# Altium PCB auto_threader.PcbDoc (part 1 of 2)
Units mil, origin at the board's own origin, x right, y up, seen from the top; angles counter-clockwise.
Board outline 1320 x 1690 mil, 4 copper layers (Signal 1, Ground, Power, Signal 2), stack 23.756 mil thick; 26 components, 26 nets, 116 pads, 98 vias.
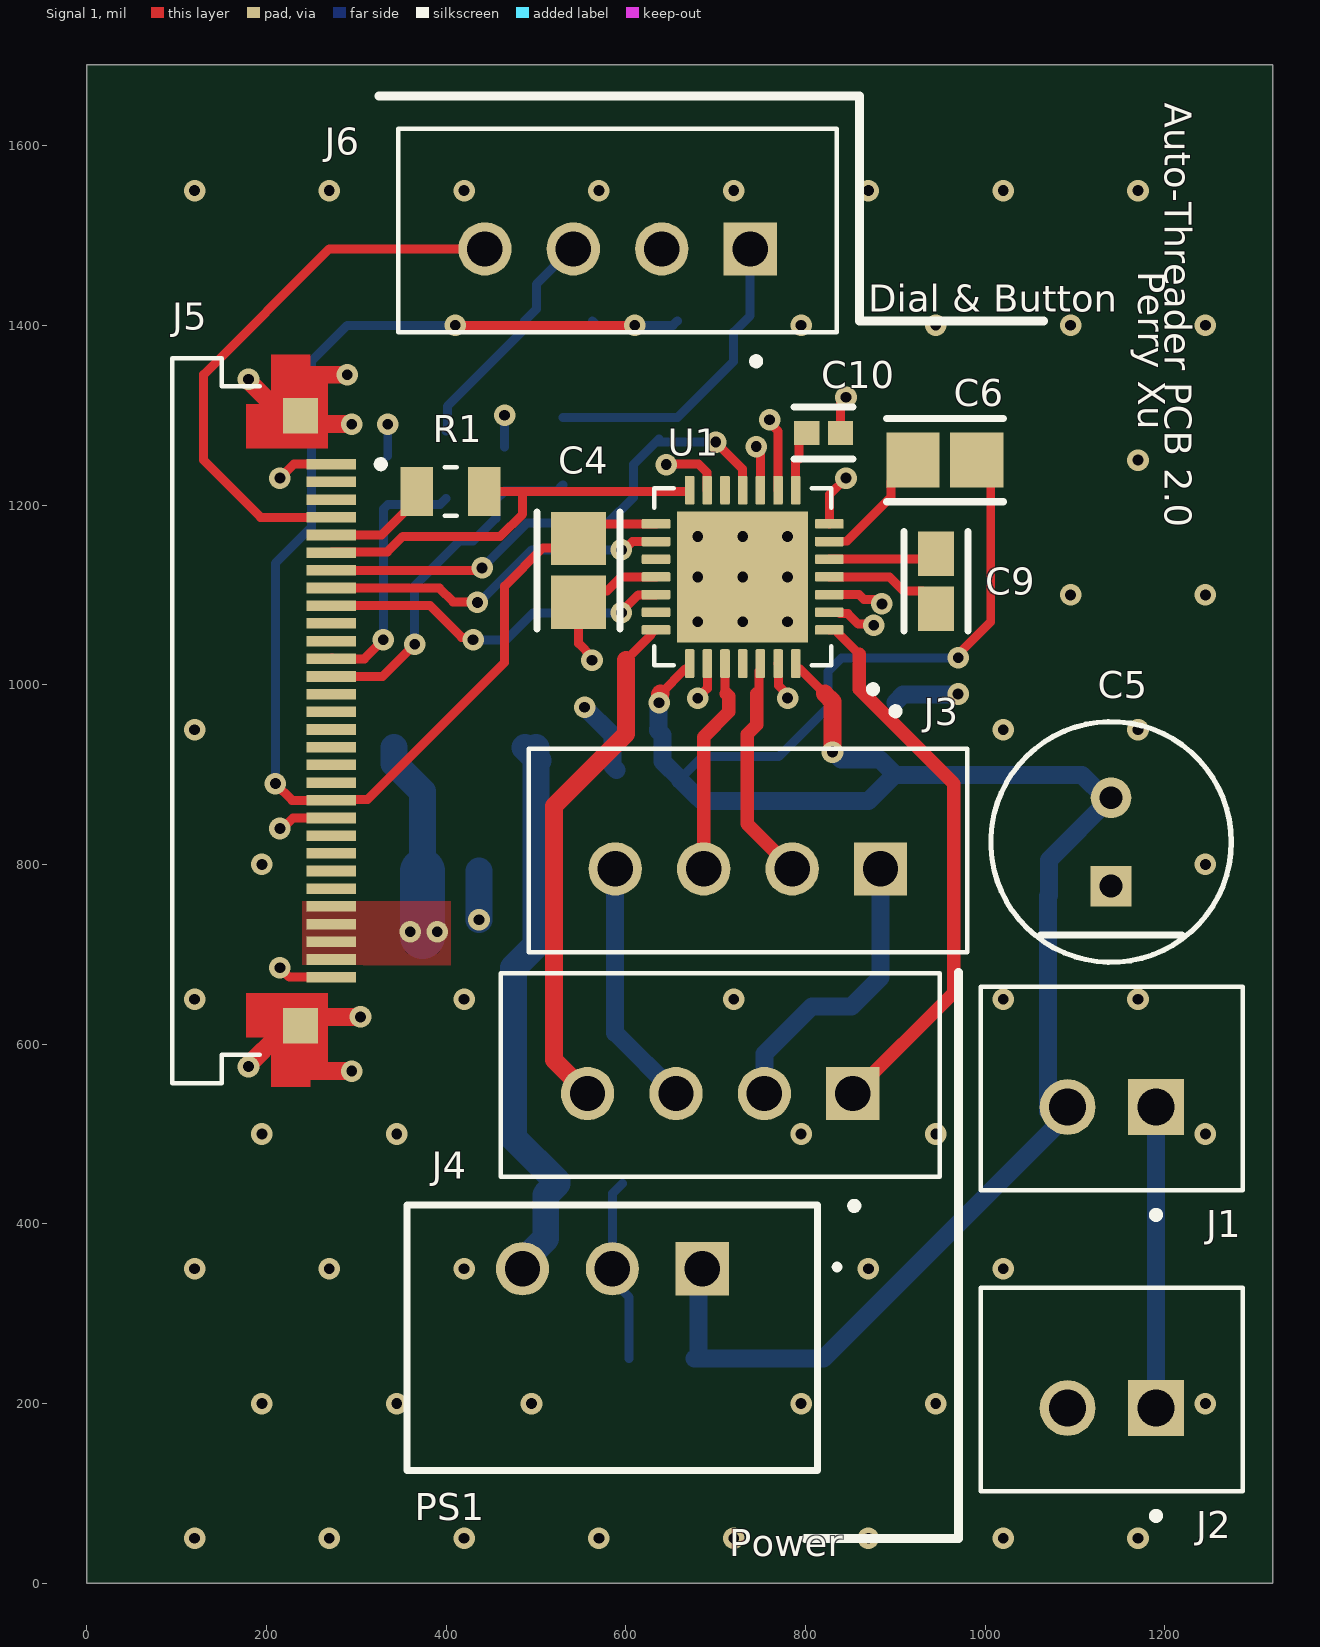
[diagram p0: Signal 1 view]
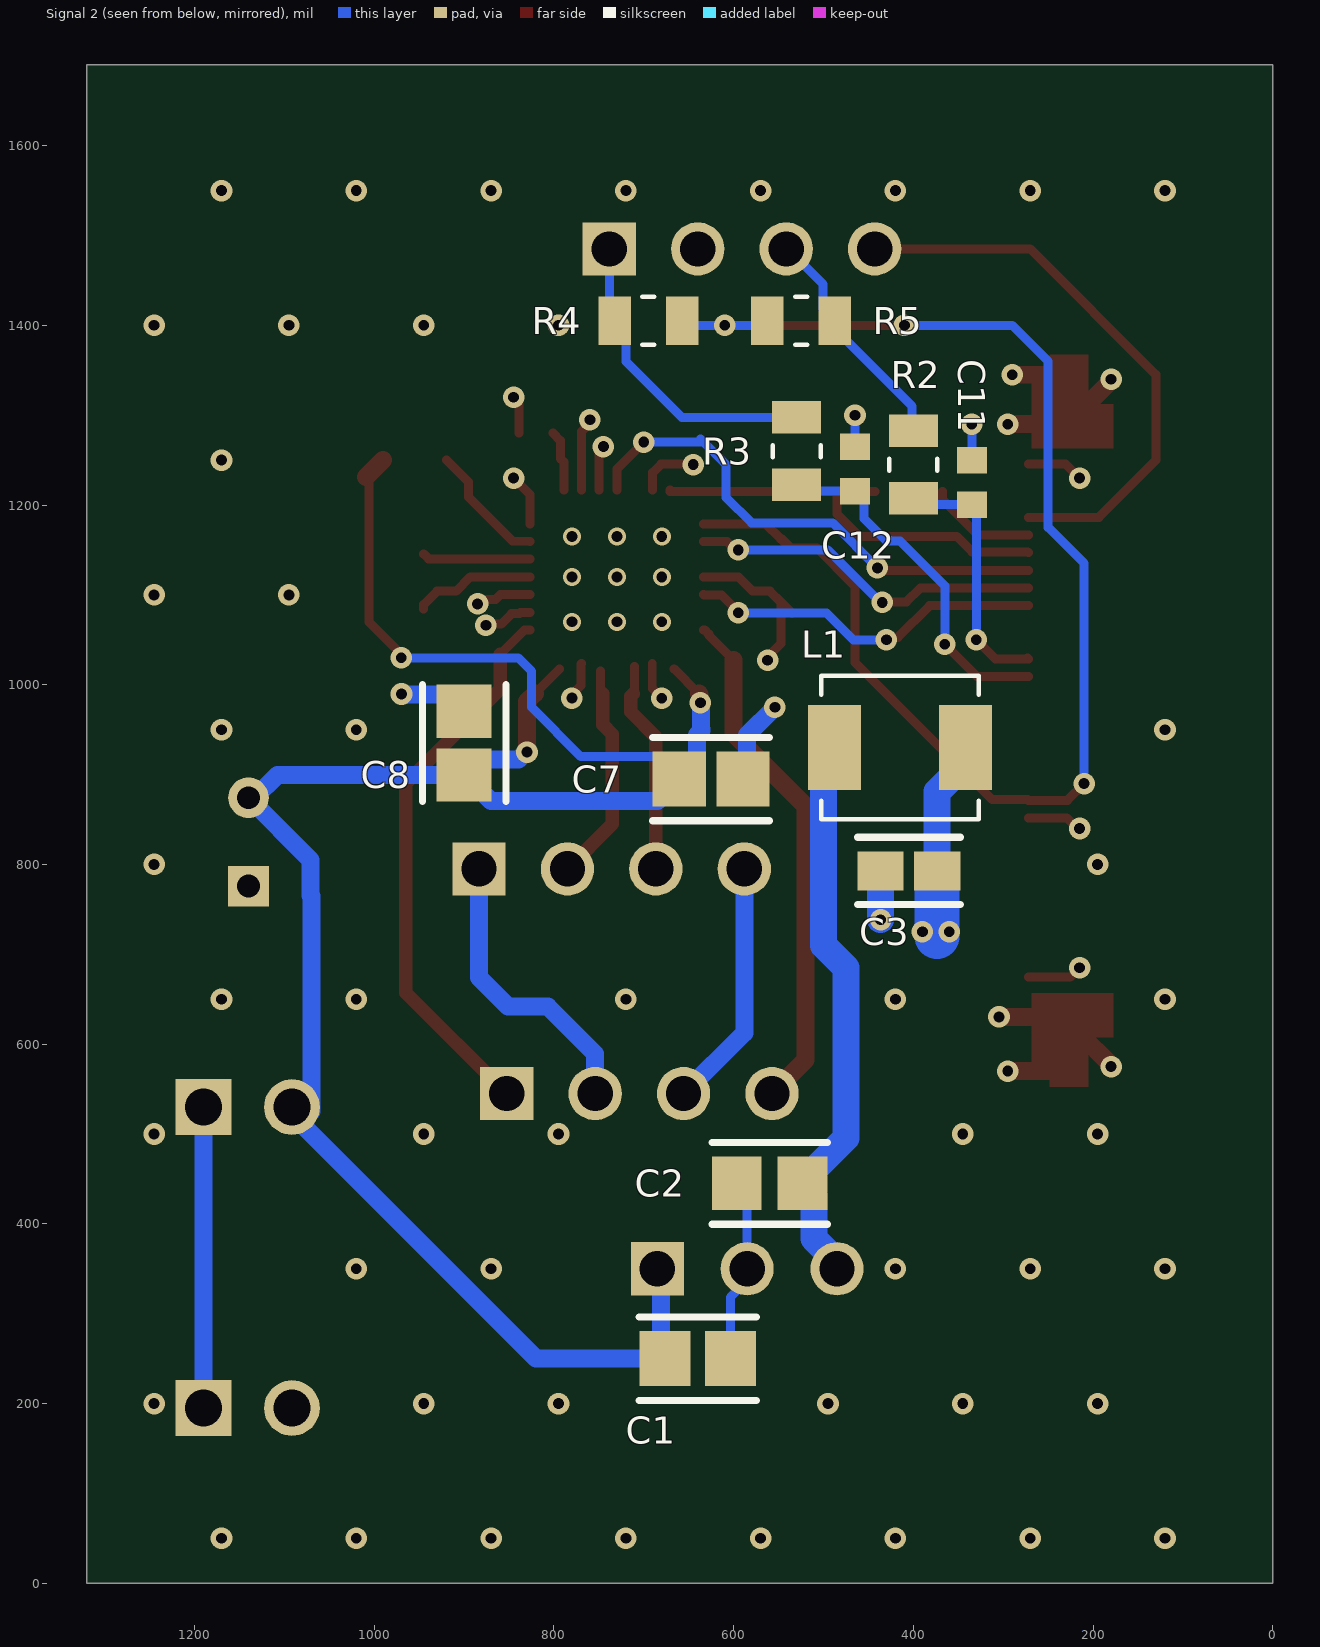
[diagram p1: Signal 2 view, seen from below]
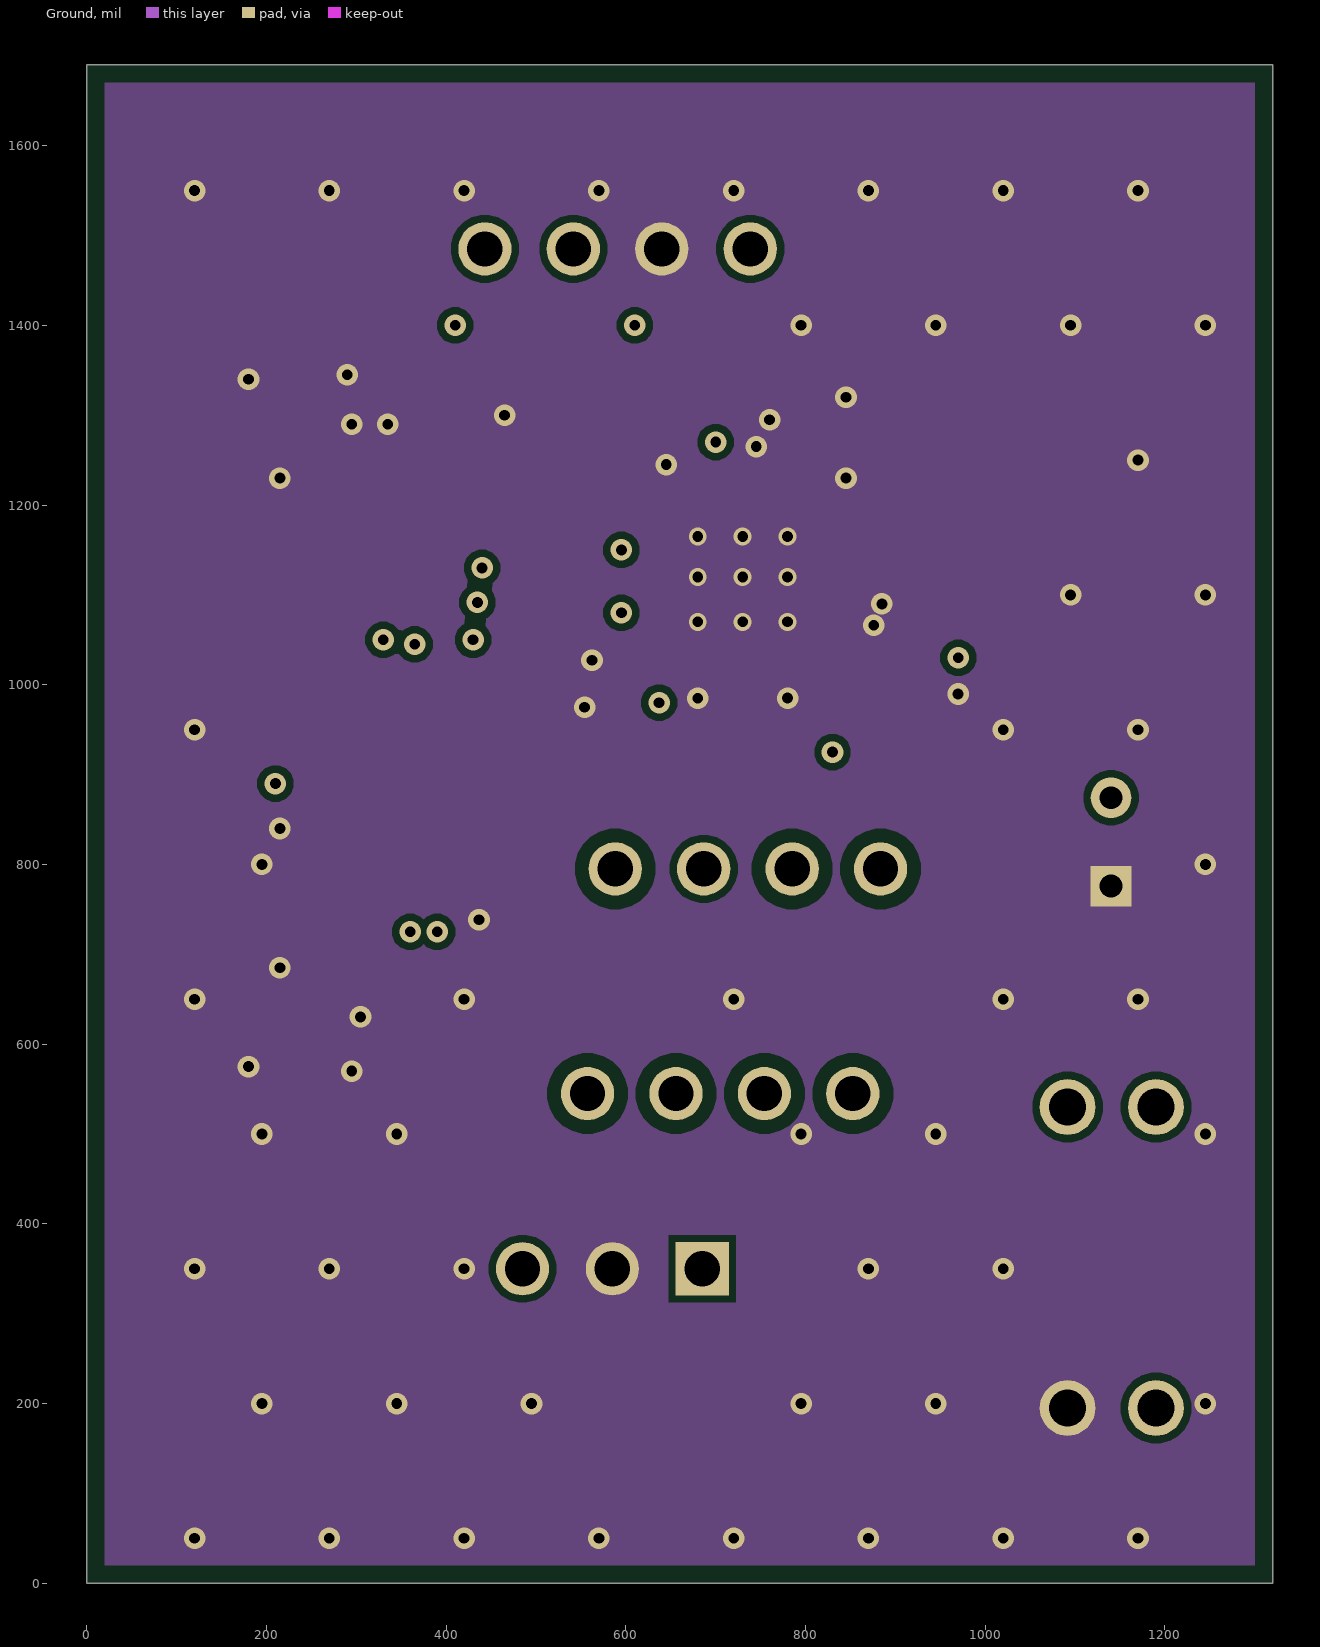
[diagram p2: Ground]
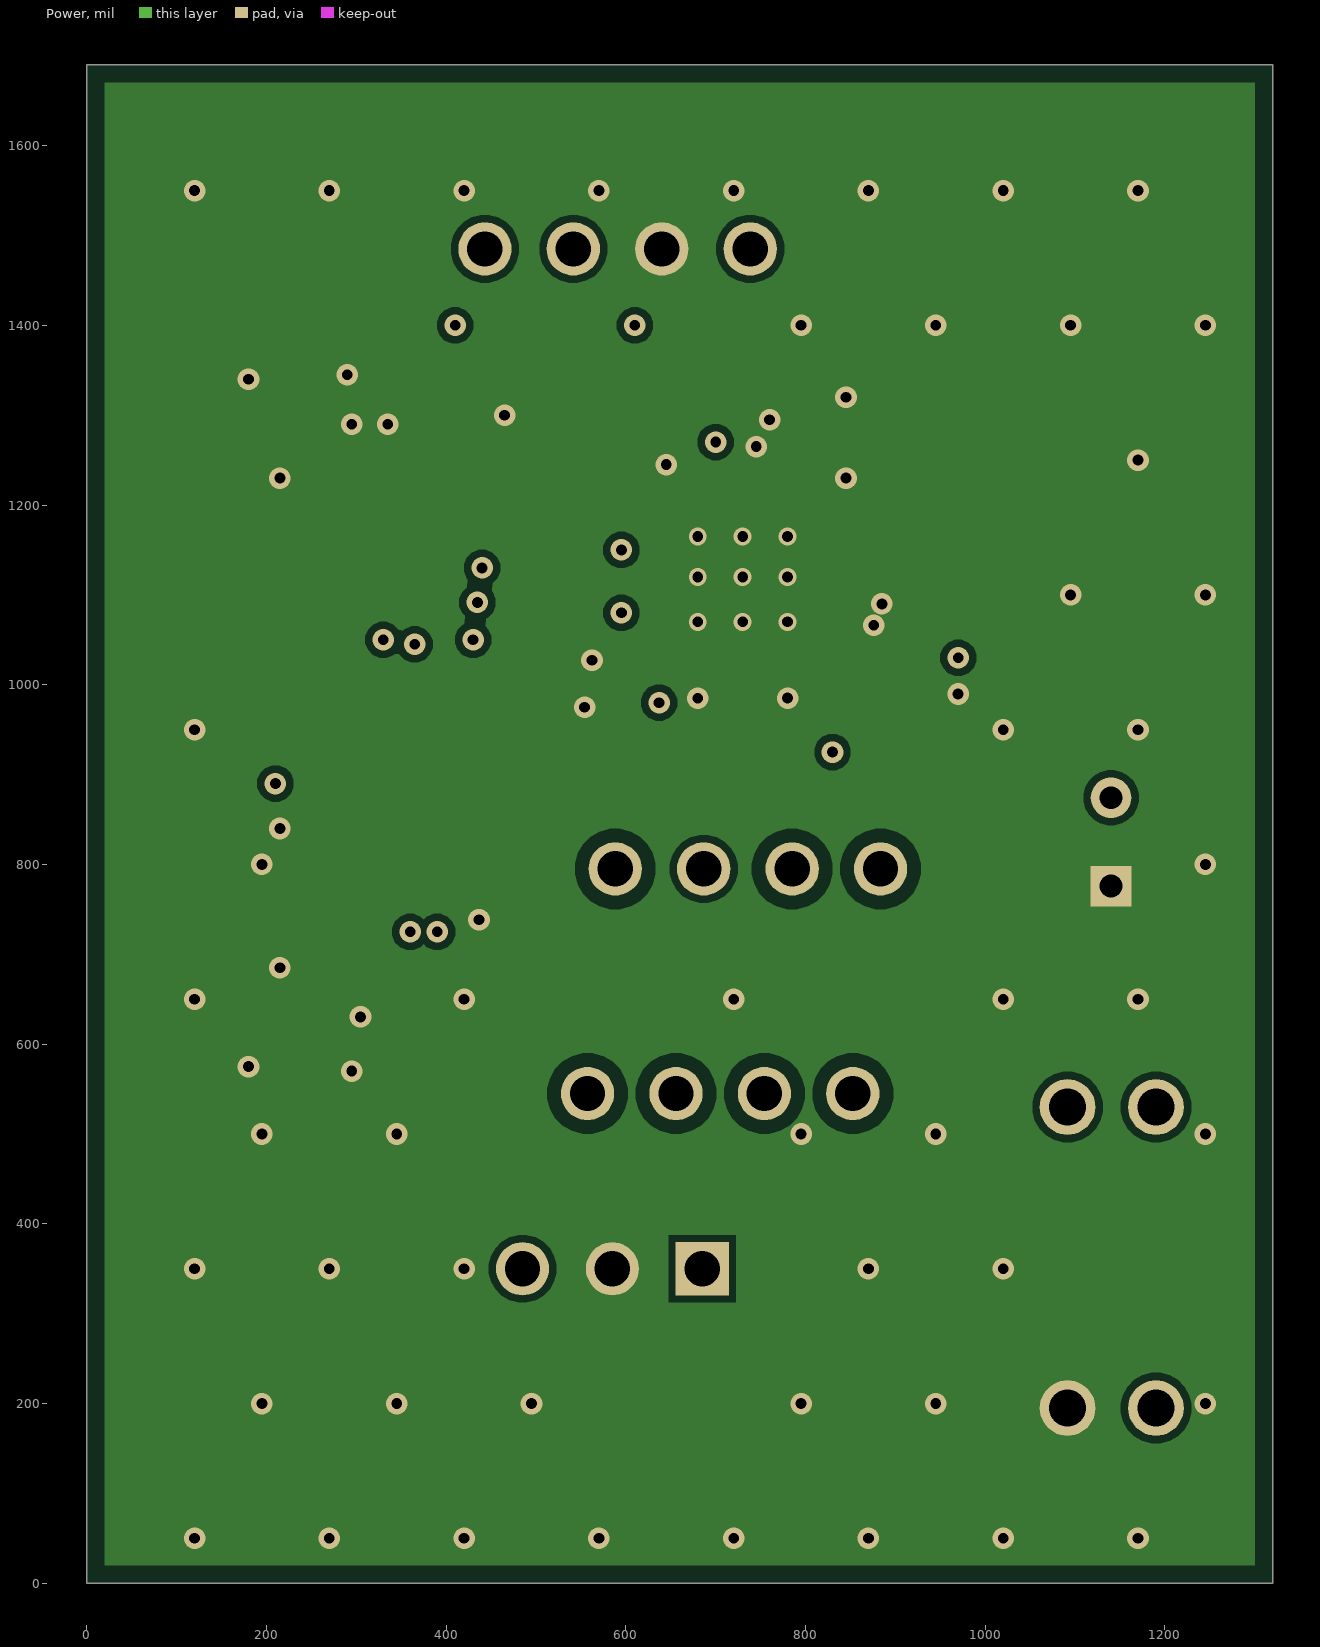
[diagram p3: Power]
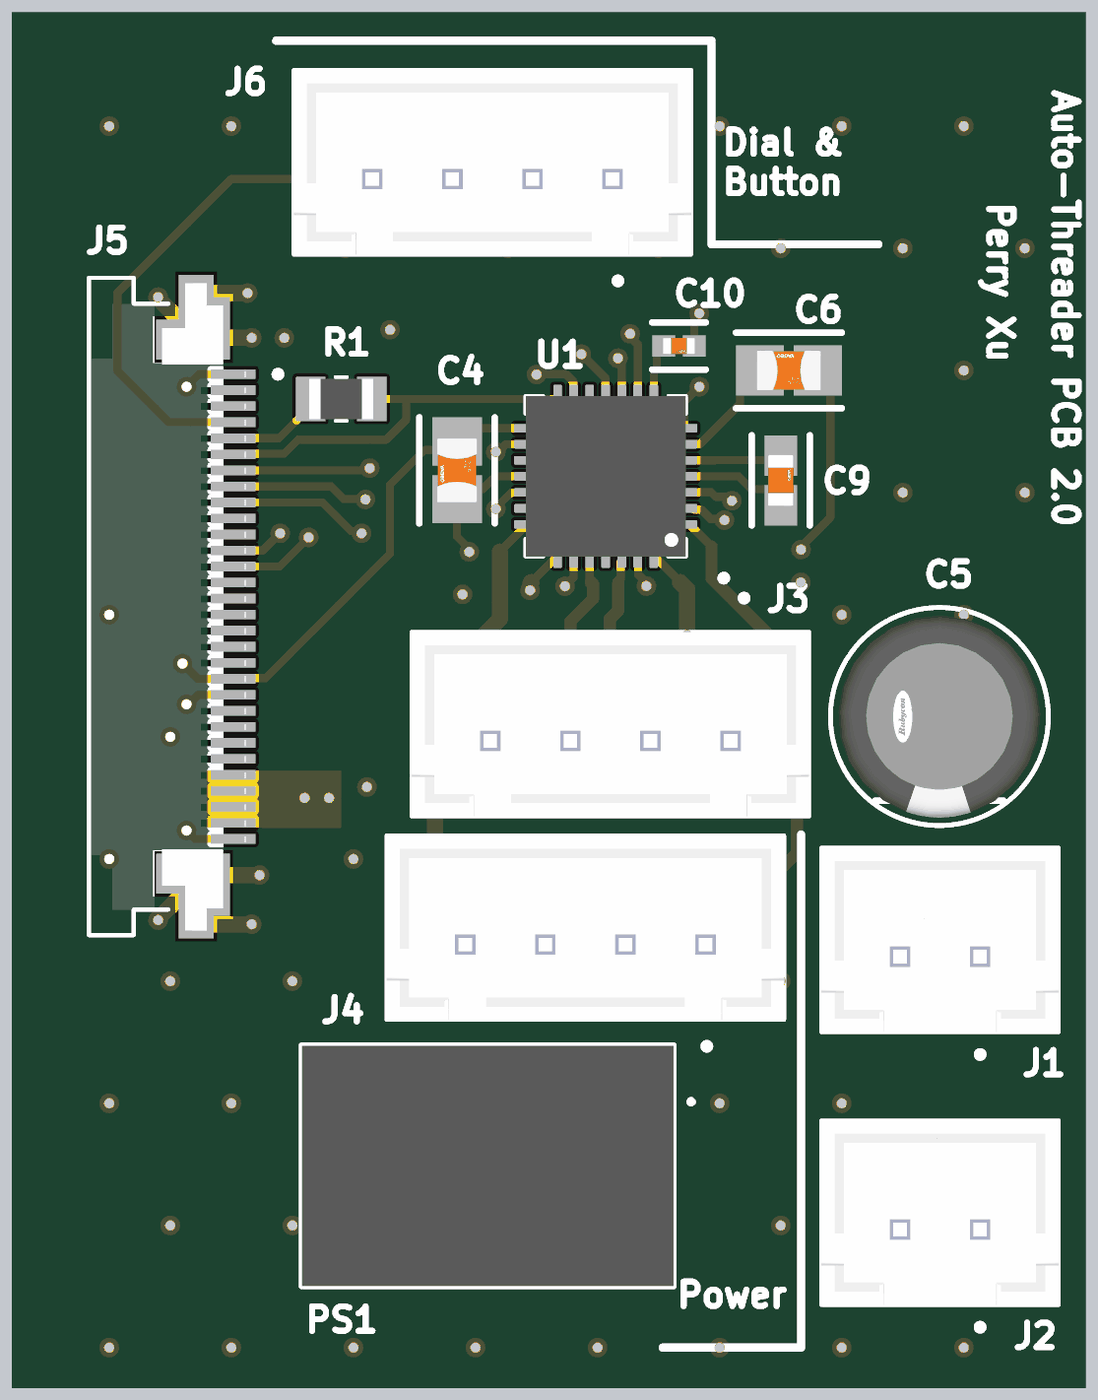
[diagram p4: 3D render of the assembled board from above, using the file's embedded part models]
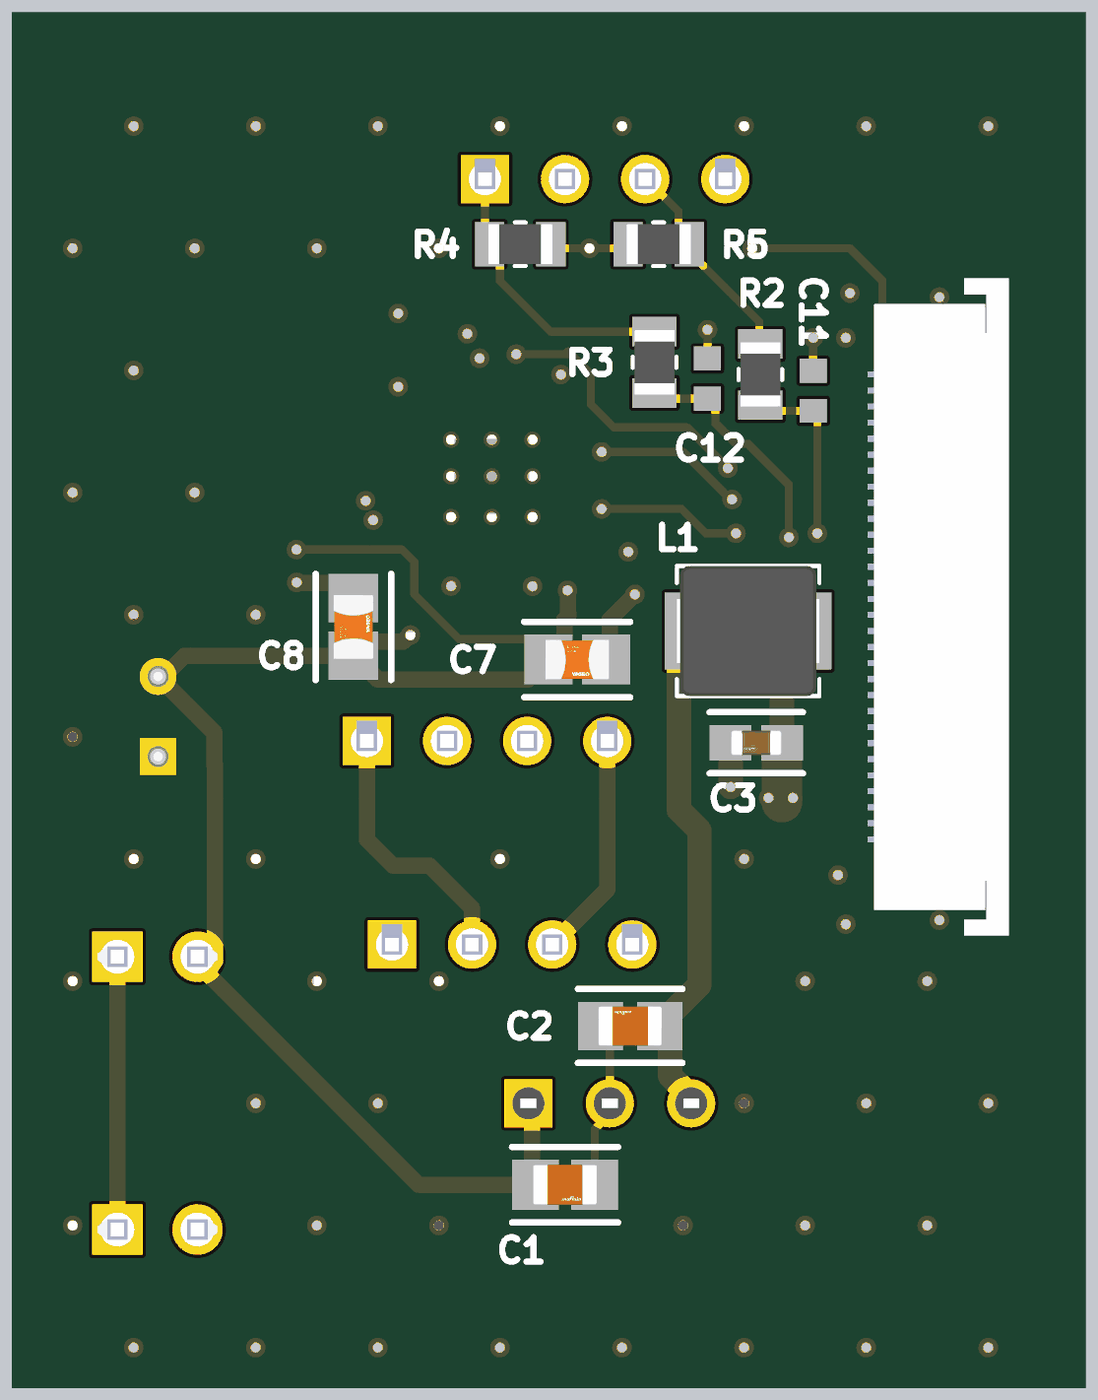
[diagram p5: 3D render of the assembled board from below, using the file's embedded part models]

## Layer stack, top to bottom
Top Solder: solder mask 0.4, Solder Resist, Dk 3.5
Signal 1: signal copper 1.4
Dielectric 2: prepreg 2.8, PP-006, Dk 4.1
Ground: signal copper 1.378
Dielectric 1: dielectric 12.6, FR-4, Dk 4.8
Power: signal copper 1.378
Dielectric 3: prepreg 2.8, PP-006, Dk 4.1
Signal 2: signal copper 1.4
Bottom Solder: solder mask 0.4, Solder Resist, Dk 3.5

## Board outline
0,0 0,1690 1320,1690 1320,0

## Design rules (kind name [scope] priority, off if disabled: settings)
Clearance TMC2209_CLEARANCE [WithinRoom('ROOM_TMC2209')] p1: gap=8 ignorepadtopadclearanceinfootprint=FALSE
Clearance MOTOR_CLEARANCE [InNetClass('MOTOR_NETS')] p2: gap=15 ignorepadtopadclearanceinfootprint=FALSE
Clearance [All] p3: gap=8 ignorepadtopadclearanceinfootprint=FALSE
PolygonConnect [All] p1: connectstyle=Direct reliefconductorwidth=10 reliefentries=4 polygonreliefangle="90 Angle" airgapwidth=10
RoomDefinition ROOM_TMC2209 [False vs False] p1: confinementstyle=ConfineIn formatcopy=TRUE lockcomponents=FALSE outline 600,990 860,990 860,1250 600,1250
RoutingVias [All] p1: holewidth=28 width=50 viastyle="Through Hole" minholewidth=28 minwidth=50 maxholewidth=28 maxwidth=50
SolderMaskExpansion [All] p1: expansion=4 istentingtop=FALSE
SupplyNets "Schematic Supply Nets_3" [InNet('VMOT')] p1: voltage=0.000
SupplyNets "Schematic Supply Nets_2" [InNet('3.3V')] p2: voltage=0.000
SupplyNets "Schematic Supply Nets_1" [InNet('GND')] p3: voltage=0.000
SupplyNets "Schematic Supply Nets" [InNet('5V')] p4: voltage=0.000
Width WIDTH_NECKDOWN_TMC2209 [WithinRoom('ROOM_TMC2209')] p1: maxlimit=10 minlimit=10 preferedwidth=10
Width MOTOR_WIDTH [InNetClass('MOTOR_NETS')] p2: maxlimit=50 minlimit=10 preferedwidth=40
Width POWER_WIDTH [InNetClass('POWER_NETS')] p3: maxlimit=80 minlimit=10 preferedwidth=20
Width [All] p4: maxlimit=20 minlimit=8 preferedwidth=10
30 further rules are at their usual default settings.

## Classes and differential pairs
net class MOTOR_NETS: M2 M2I M3 M4 M4I
net class POWER_NETS: 3.3V 5V GND NetC2_1 VMOT
component class auto_threader: C1 C2 C3 C4 C5 C6 C7 C8 C9 C10 C11 J2 J4 J6 L1 PS1 R4 R5 U1

## Components (designator, comment, footprint, x,y, rotation, side; value= is the part's Value field where it differs from the comment)
C1 "10u" GRM21BR61H106KE43L 640,250 r180 bottom value=10µF
C2 "10u" GRM21BR71A106KA73L 560,445 r0 bottom
C3 "22u" GRM188R61A226ME15D 405.03,792.73 r0 bottom value=22µF
C4 "100n" CC0805KRX7R9BB104 547.31,1127.31 r270 top value=100nF
C5 "100u" 35ZLH100MEFC6.3X11 1140,825 r90 top value=100µF
C6 "100n" CC0805KRX7R9BB104 955,1250 r180 top value=100nF
C7 "100n" CC0805KRX7R9BB104 625,895 r180 bottom value=100nF
C8 "100n" CC0805KRX7R9BB104 900,935 r90 bottom value=100nF
C9 "22n" CC0603KRX7R9BB223 945,1115 r270 top value=22nF
C10 "2.2u" GRM155C80J225KE95D 820,1280 r0 top value=2.2µF
C11 "10n" GCM188R71H103KA37D 335,1225 r90 bottom value=10nF
C12 "10n" GCM188R71H103KA37D 465,1240 r90 bottom value=10nF
J1 "B2B-XH-A" B2B-XH-A 1140.79,530 r0 top
J2 "B2B-XH-A" B2B-XH-A 1140.79,195 r0 top
J3 "B4B-XH-A" B4B-XH-A 735.79,795 r0 top
J4 "B4B-XH-A" B4B-XH-A 705,545 r0 top
J5 "SFV30R_1STE1HLF" SFV30R-1STE1HLF 255,960 r270 top
J6 "B4B-XH-A" B4B-XH-A 590.79,1485 r0 top
L1 "10u" SRP4020TA-100M 415,930 r180 bottom value=10µH
PS1 "P7805-Q24-S5-S" P7805-Q24-S5-S 685,350 r180 top
R1 "1k" RC0805FR-071KL 405,1215 r0 top value=1kΩ
R2 "10k" RC0805FR-0710KL 400,1245 r90 bottom value=10kΩ
R3 "10k" RC0805FR-0710KL 530,1260 r90 bottom value=10kΩ
R4 "10k" RC0805FR-0710KL 695,1405 r180 bottom value=10kΩ
R5 "10k" RC0805FR-0710KL 525,1405 r0 bottom value=10kΩ
U1 "TMC2209-LA" TMC2209-LA 730,1120 r180 top

## Footprints (in the part's own frame and the unit in brackets; to place one, negate y for a bottom-side part, rotate by r counter-clockwise, add the part's x,y. Pads: shape width x height; smd on the part's side, far side on the other; paste and mask are expansions set on the pad)
35ZLH100MEFC6.3X11 [mm]
  rect 1.15x1.15 hole 0.65 paste-2539.97 mask+0: 1(-1.25,0)
  round 1.15 hole 0.65 paste-2539.97 mask+0: 2(1.25,0)
  silkscreen extent -3.4,-3.4 3.4,3.4, body extent -3.5,-3.5 3.5,3.5, height 0.25
B2B-XH-A [mm]
  rect 1.575x1.575 / inner round 1.575 / far side rect 1.575x1.575 hole 1.05: 1(1.25,0)
  round 1.575 hole 1.05: 2(-1.25,0)
  silkscreen extent -3.7,-3.15 3.7,3.4, body extent -3.7,-2.35 3.7,3.4, height 7.01
B4B-XH-A [mm]
  rect 1.508x1.508 / inner round 1.508 / far side rect 1.508x1.508 hole 1: 1(3.75,0)
  round 1.508 hole 1: 2(1.25,0) 3(-1.25,0) 4(-3.75,0)
  silkscreen extent -6.2,-2.35 6.2,4.56, body extent -6.2,-2.35 6.2,3.4, height 7
CC0603KRX7R9BB223 [mil]
  rect 49.53x39.85 smd paste+0 mask+0: 1(-30.59,0) 2(30.59,0)
  silkscreen extent -55,-36 55,36, body extent -75,-40 75,40, height 10
CC0805KRX7R9BB104 [mil]
  rect 59.24x61.27 smd paste+0 mask+0: 1(-35.46,0) 2(35.46,0)
  silkscreen extent -65,-46 65,46, body extent -85,-50 85,50, height 10
GCM188R71H103KA37D [mm]
  rect 0.75x0.85 smd: 1(-0.625,0) 2(0.625,0)
  body extent -0.85,-0.45 0.85,0.45, height 0.9
GRM21BR61H106KE43L [mil]
  rect 57.27x61.27 smd paste+0 mask+0: 1(-36.45,0) 2(36.45,0)
  silkscreen extent -65,-46 65,46, body extent -39,-25 39,25, height 57
GRM21BR71A106KA73L [mil]
  rect 55.34x59.38 smd paste+0 mask+0: 1(-36.47,0) 2(36.47,0)
  silkscreen extent -64,-45 64,45, body extent -39,-25 39,25, height 55
GRM155C80J225KE95D [mil]
  rect 28.16x26.48 smd paste+0 mask+0: 1(-18.84,0) 2(18.84,0)
  silkscreen extent -33,-29 33,29, body extent -41,-21 41,21, height 10
GRM188R61A226ME15D [mil]
  rect 51.38x43.55 smd paste+0 mask+0: 1(-31.52,0) 2(31.52,0)
  silkscreen extent -57,-38 57,38, body extent -31,-16 31,16, height 39
P7805-Q24-S5-S [mm]
  rect 1.5x1.5 hole 1: 1(0,0)
  round 1.5 hole 1: 2(2.54,0) 3(5.08,0)
  silkscreen extent -3.86,-1.8 8.34,5.7, body extent -3.26,-1.8 8.34,5.7, height 10.21
RC0805FR-071KL [mm]
  rect 0.92x1.38 smd: 1(-0.955,0) 2(0.955,0)
  silkscreen extent -0.17,-0.68 0.17,0.68, body extent -1,-0.63 1,0.63, height 0.6
RC0805FR-0710KL [mm]
  rect 0.92x1.38 smd: 1(-0.955,0) 2(0.955,0)
  silkscreen extent -0.17,-0.68 0.17,0.68, body extent -1,-0.63 1,0.63, height 0.6
SFV30R-1STE1HLF [mm]
  rect 0.3x1.4 smd: 1(-7.25,0.435) 2(-6.75,0.435) 3(-6.25,0.435) 4(-5.75,0.435) 5(-5.25,0.435) 6(-4.75,0.435) 7(-4.25,0.435) 8(-3.75,0.435) 9(-3.25,0.435) 10(-2.75,0.435) 11(-2.25,0.435) 12(-1.75,0.435) 13(-1.25,0.435) 14(-0.75,0.435) 15(-0.25,0.435) 16(0.25,0.435) 17(0.75,0.435) 18(1.25,0.435) 19(1.75,0.435) 20(2.25,0.435) 21(2.75,0.435) 22(3.25,0.435) 23(3.75,0.435) 24(4.25,0.435) 25(4.75,0.435) 26(5.25,0.435) 27(5.75,0.435) 28(6.25,0.435) 29(6.75,0.435) 30(7.25,0.435)
  rect 1x1 smd paste-1 mask+0: SH1(-8.62,-0.435) SH2(8.62,-0.435)
  Signal 1 region: 9.65,-0.165 10.35,-0.165 10.35,-1.265 8.95,-1.265 8.95,-1.965 7.7,-1.965 7.7,0.335 9.65,0.335
  Signal 1 region: -7.7,-1.965 -8.95,-1.965 -8.95,-1.265 -10.35,-1.265 -10.35,-0.165 -9.65,-0.165 -9.65,0.335 -7.7,0.335
  silkscreen extent -10.25,-4.07 10.25,1.93, body extent -10.25,-4.07 10.25,0.83, height 1.87
SRP4020TA-100M [mm]
  rect 1.5x2.4 smd: 1(-1.85,0) 2(1.85,0)
  silkscreen extent -2.22,-2.03 2.22,2.03, body extent -2.22,-2.03 2.22,2.03, height 2.01
TMC2209-LA [mm]
  rrect25% 0.81x0.27 smd: 1(-2.45,1.5) 2(-2.45,1) 3(-2.45,0.5) 4(-2.45,0) 5(-2.45,-0.5) 6(-2.45,-1) 7(-2.45,-1.5) 15(2.45,-1.5) 16(2.45,-1) 17(2.45,-0.5) 18(2.45,0) 19(2.45,0.5) 20(2.45,1) 21(2.45,1.5)
  rrect25% 0.27x0.81 smd: 8(-1.5,-2.45) 9(-1,-2.45) 10(-0.5,-2.45) 11(0,-2.45) 12(0.5,-2.45) 13(1,-2.45) 14(1.5,-2.45) 22(1.5,2.45) 23(1,2.45) 24(0.5,2.45) 25(0,2.45) 26(-0.5,2.45) 27(-1,2.45) 28(-1.5,2.45)
  rect 3.7x3.7 smd paste-0.68: 29(0,0)
  silkscreen extent -3.78,-2.5 2.5,3.27, body extent -2.5,-2.5 2.5,2.5, height 0.9

## Part data
C1: library part GRM21BR61H106KE43L, "50V 10uF X5R ±10% 0805 Multilayer Ceramic Capacitors MLCC - SMD/SMT ROHS", Case/Package=0805, Dielectric=X5R, Dielectric Material=Ceramic, Manufacturer=Murata, Manufacturer Lifecycle Status="IN PRODUCTION", Max Operating Temperature=85°C, Min Operating Temperature=-55°C, Supplier Part Number=490-18663-1-ND, Tolerance=10%, Voltage Rating=50V, Category="Ceramic Capacitors", ComponentLink1Description=https://datasheet.octopart.com:443/GRM21BR61H106KE43L-Murata-datasheet-155345082.pdf?src-supplier=Newark, ComponentLink1URL=https://datasheet.octopart.com:443/GRM21BR61H106KE43L-Murata-datasheet-155345082.pdf?src-supplier=Newark, ComponentLink2Description=https://datasheet.octopart.com:443/GRM21BR61H106KE43L-Murata-datasheet-141278272.pdf?src-supplier=Geoflip, ComponentLink2URL=https://datasheet.octopart.com:443/GRM21BR61H106KE43L-Murata-datasheet-141278272.pdf?src-supplier=Geoflip, ComponentLink3Description=https://datasheet.octopart.com:443/GRM21BR61H106KE43L-Murata-datasheet-165579666.pdf?src-supplier=TME, ComponentLink3URL=https://datasheet.octopart.com:443/GRM21BR61H106KE43L-Murata-datasheet-165579666.pdf?src-supplier=TME, ComponentLink4Description=https://datasheet.octopart.com:443/GRM21BR61H106KE43L-Murata-datasheet-140707579.pdf?src-supplier=Ciiva, ComponentLink4URL=https://datasheet.octopart.com:443/GRM21BR61H106KE43L-Murata-datasheet-140707579.pdf?src-supplier=Ciiva, ComponentLink5Description=https://datasheet.octopart.com:443/GRM21BR61H106KE43L-Murata-datasheet-138744880.pdf?src-supplier=Ciiva, ComponentLink5URL=https://datasheet.octopart.com:443/GRM21BR61H106KE43L-Murata-datasheet-138744880.pdf?src-supplier=Ciiva, ComponentLink6Description=https://datasheet.octopart.com/GRM21BR61H106KE43L-Murata-datasheet-12515295.pdf, ComponentLink6URL=https://datasheet.octopart.com/GRM21BR61H106KE43L-Murata-datasheet-12515295.pdf, ComponentLink7Description=https://datasheet.octopart.com/GRM21BR61H106KE43L-Murata-datasheet-12510076.pdf, ComponentLink7URL=https://datasheet.octopart.com/GRM21BR61H106KE43L-Murata-datasheet-12510076.pdf, ComponentLink8Description=https://datasheet.octopart.com/GRM21BR61H106KE43L-Murata-datasheet-11978611.pdf, ComponentLink8URL=https://datasheet.octopart.com/GRM21BR61H106KE43L-Murata-datasheet-11978611.pdf, ComponentLink9Description=https://datasheet.octopart.com/GRM21BR61H106KE43L-Murata-datasheet-10025737.pdf, ComponentLink9URL=https://datasheet.octopart.com/GRM21BR61H106KE43L-Murata-datasheet-10025737.pdf, ComponentLink10Description=https://datasheet.octopart.com/GRM21BR61H106KE43L-Murata-datasheet-8819587.pdf, ComponentLink10URL=https://datasheet.octopart.com/GRM21BR61H106KE43L-Murata-datasheet-8819587.pdf, ComponentLink11Description=http://sigma.octopart.com:80/reach_statement/Murata-company-16.pdf?src-supplier=Compliance+Statements, ComponentLink11URL=http://sigma.octopart.com:80/reach_statement/Murata-company-16.pdf?src-supplier=Compliance+Statements, Country of Origin="Japan, Mainland China, Philippines, Singapore, Thailand", Export Control Classification Number (ECCN) Code=EAR99, Harmonized Tariff Schedule (HTS) Code=8532.24.00.20, Height=1.25mm, Introduction Date=2018-09-13, Length=2mm, Lifecycle Status=Production, Manufacturer Part Number=GRM21BR61H106KE43L, Material=Ceramic, Mounting Technology="Surface Mount", Number of Terminals=2, Pricing="1=0.31, 10=0.183, 50=0.133, 100=0.1177, 500=0.09208, 1000=0.08416 (USD)", REACH SVHC=Yes, RoHS=Compliant, Stock=1260835, Supplier=DigiKey, Supplier 1=DigiKey, Supplier Part Number 1=490-18663-1-ND, Thickness=1.25mm, Voltage Rating (DC)=50V, Width=1.25mm
C2: library part GRM21BR71A106KA73L, "Chip Multilayer Ceramic Capacitors for General Purpose, 0805, 10uF, X7R, 15%, 10%, 10V", Capacitance=10uF, Case Code (Imperial)=0805, Case Code (Metric)=2012, Dielectric=X7R, Max Operating Temperature=125°C, Min Operating Temperature=-55°C, Package Quantity=3000, Supplier Part Number 1=490-10516-1-ND, Tolerance=10%, Voltage Rating=10V, Case/Package=0805, Depth=1.25mm, Height=1.25mm, Length=2mm, Mount="Surface Mount", Packaging="Tape and Reel", REACH SVHC="No SVHC", Supplier 1=DigiKey, Termination=SMD/SMT, Thickness=0.055inch, Voltage Rating (DC)=10V, Weight=0.000335oz, Width=1.25mm
C3: library part GRM188R61A226ME15D, "10V 22uF X5R ±20% 0603 Multilayer Ceramic Capacitors MLCC - SMD/SMT ROHS", Case Code (Imperial)=0603, Case Code (Metric)=1608, Dielectric=X5R, Dielectric Material=Ceramic, Manufacturer=Murata, Manufacturer Lifecycle Status="IN PRODUCTION", Max Operating Temperature=85°C, Min Operating Temperature=-55°C, Supplier Part Number=490-10476-1-ND, Tolerance=20%, Voltage Rating=10V, Case/Package=0603, Category="Ceramic Capacitors", ComponentLink1Description=https://datasheet.octopart.com:443/GRM188R61A226ME15D-Murata-datasheet-27203393.pdf?src-supplier=Newark, ComponentLink1URL=https://datasheet.octopart.com:443/GRM188R61A226ME15D-Murata-datasheet-27203393.pdf?src-supplier=Newark, ComponentLink2Description=https://datasheet.octopart.com:443/GRM188R61A226ME15D-Murata-datasheet-62317190.pdf?src-supplier=element14+APAC, ComponentLink2URL=https://datasheet.octopart.com:443/GRM188R61A226ME15D-Murata-datasheet-62317190.pdf?src-supplier=element14+APAC, ComponentLink3Description=https://datasheet.octopart.com:443/GRM188R61A226ME15D-Murata-datasheet-165579666.pdf?src-supplier=TME, ComponentLink3URL=https://datasheet.octopart.com:443/GRM188R61A226ME15D-Murata-datasheet-165579666.pdf?src-supplier=TME, ComponentLink4Description=https://datasheet.octopart.com:443/GRM188R61A226ME15D-Murata-datasheet-81639591.pdf?src-supplier=TME, ComponentLink4URL=https://datasheet.octopart.com:443/GRM188R61A226ME15D-Murata-datasheet-81639591.pdf?src-supplier=TME, ComponentLink5Description=https://datasheet.octopart.com:443/GRM188R61A226ME15D-Murata-datasheet-141274968.pdf?src-supplier=Ciiva, ComponentLink5URL=https://datasheet.octopart.com:443/GRM188R61A226ME15D-Murata-datasheet-141274968.pdf?src-supplier=Ciiva, ComponentLink6Description=https://datasheet.octopart.com:443/GRM188R61A226ME15D-Murata-datasheet-140704447.pdf?src-supplier=Ciiva, ComponentLink6URL=https://datasheet.octopart.com:443/GRM188R61A226ME15D-Murata-datasheet-140704447.pdf?src-supplier=Ciiva, ComponentLink7Description=https://datasheet.octopart.com:443/GRM188R61A226ME15D-Murata-datasheet-138742833.pdf?src-supplier=Ciiva, ComponentLink7URL=https://datasheet.octopart.com:443/GRM188R61A226ME15D-Murata-datasheet-138742833.pdf?src-supplier=Ciiva, ComponentLink8Description=https://datasheet.octopart.com/GRM188R61A226ME15D-Murata-datasheet-12515295.pdf, ComponentLink8URL=https://datasheet.octopart.com/GRM188R61A226ME15D-Murata-datasheet-12515295.pdf, ComponentLink9Description=https://datasheet.octopart.com/GRM188R61A226ME15D-Murata-datasheet-12510076.pdf, ComponentLink9URL=https://datasheet.octopart.com/GRM188R61A226ME15D-Murata-datasheet-12510076.pdf, ComponentLink10Description=https://datasheet.octopart.com/GRM188R61A226ME15D-Murata-datasheet-11978611.pdf, ComponentLink10URL=https://datasheet.octopart.com/GRM188R61A226ME15D-Murata-datasheet-11978611.pdf, ComponentLink11Description=https://datasheet.octopart.com/GRM188R61A226ME15D-Murata-datasheet-10025737.pdf, ComponentLink11URL=https://datasheet.octopart.com/GRM188R61A226ME15D-Murata-datasheet-10025737.pdf, ComponentLink12Description=https://datasheet.octopart.com/GRM188R61A226ME15D-Murata-datasheet-8819587.pdf, ComponentLink12URL=https://datasheet.octopart.com/GRM188R61A226ME15D-Murata-datasheet-8819587.pdf, ComponentLink13Description=https://datasheet.octopart.com/GRM188R61A226ME15D-Murata-datasheet-38883270.pdf, ComponentLink13URL=https://datasheet.octopart.com/GRM188R61A226ME15D-Murata-datasheet-38883270.pdf, ComponentLink14Description=https://datasheet.octopart.com:443/GRM188R61A226ME15D-Murata-datasheet-62287447.pdf?src-supplier=Future+Electronics, ComponentLink14URL=https://datasheet.octopart.com:443/GRM188R61A226ME15D-Murata-datasheet-62287447.pdf?src-supplier=Future+Electronics, ComponentLink15Description=http://sigma.octopart.com:80/reach_statement/Murata-company-16.pdf?src-supplier=Compliance+Statements, ComponentLink15URL=http://sigma.octopart.com:80/reach_statement/Murata-company-16.pdf?src-supplier=Compliance+Statements, Depth=800µm, Height=800µm, Lead Free="Lead Free", Length=1.6mm, Lifecycle Status=Production, Manufacturer Part Number=GRM188R61A226ME15D, Material=Ceramic, Mounting Technology="Surface Mount", Number of Terminals=2, Pricing="1=0.16, 10=0.089, 50=0.0628, 100=0.0546, 500=0.04104, 1000=0.03687 (USD)", REACH SVHC=Yes, RoHS=Compliant, Schedule B="8532240020, 8532240020|8532240020|8532240020|8532240020|8532240020|8532240020|8532240020|8532240020|8532240020|8532240020|8532240020|8532240020|8532240020|8532240020|8532240020|8532240020|8532240020|8532240020|8532240020|8532240020|8532240020|8532240020|8532240020|85", Stock=3792271, Supplier=DigiKey, Supplier 1=DigiKey, Supplier Part Number 1=490-10476-1-ND, Termination=SMD/SMT, Thickness=800µm, Voltage Rating (DC)=10V, Weight=6.293594mg, Width=800µm
C4 C6 C7 C8: library part CC0805KRX7R9BB104, "50V 100nF X7R ±10% 0805 Multilayer Ceramic Capacitors MLCC - SMD/SMT ROHS", Case Code (Imperial)=0805, Case Code (Metric)=2012, Dielectric=X7R, Dielectric Material=Ceramic, Insulation Resistance=100GΩ, Manufacturer="Yageo Group", Manufacturer Package Identifier=CC0805-0.85, Max Operating Temperature=125°C, Min Operating Temperature=-55°C, Supplier Part Number=311-1140-1-ND, Tolerance=10%, Voltage=50V, Case/Package=0805, Category="Ceramic Capacitors", China RoHS=Compliant, ComponentLink1Description=https://datasheet.octopart.com:443/CC0805KRX7R9BB104-Yageo-datasheet-177165144.pdf?src-supplier=IHS, ComponentLink1URL=https://datasheet.octopart.com:443/CC0805KRX7R9BB104-Yageo-datasheet-177165144.pdf?src-supplier=IHS, ComponentLink2Description=https://datasheet.octopart.com:443/CC0805KRX7R9BB104-Yageo-datasheet-78855689.pdf?src-supplier=Upverter, ComponentLink2URL=https://datasheet.octopart.com:443/CC0805KRX7R9BB104-Yageo-datasheet-78855689.pdf?src-supplier=Upverter, ComponentLink3Description=https://datasheet.octopart.com:443/CC0805KRX7R9BB104-Yageo-datasheet-68298032.pdf?src-supplier=Upverter, ComponentLink3URL=https://datasheet.octopart.com:443/CC0805KRX7R9BB104-Yageo-datasheet-68298032.pdf?src-supplier=Upverter, ComponentLink4Description=https://datasheet.octopart.com:443/CC0805KRX7R9BB104-Yageo-Group-datasheet-189192896.pdf?src-supplier=Future+Electronics, ComponentLink4URL=https://datasheet.octopart.com:443/CC0805KRX7R9BB104-Yageo-Group-datasheet-189192896.pdf?src-supplier=Future+Electronics, ComponentLink5Description=https://datasheet.octopart.com:443/CC0805KRX7R9BB104-Yageo-datasheet-166511530.pdf?src-supplier=Future+Electronics, ComponentLink5URL=https://datasheet.octopart.com:443/CC0805KRX7R9BB104-Yageo-datasheet-166511530.pdf?src-supplier=Future+Electronics, ComponentLink6Description=https://datasheet.octopart.com:443/CC0805KRX7R9BB104-Yageo-datasheet-137700082.pdf?src-supplier=Future+Electronics, ComponentLink6URL=https://datasheet.octopart.com:443/CC0805KRX7R9BB104-Yageo-datasheet-137700082.pdf?src-supplier=Future+Electronics, ComponentLink7Description=https://datasheet.octopart.com:443/CC0805KRX7R9BB104-Yageo-datasheet-137700084.pdf?src-supplier=Future+Electronics, ComponentLink7URL=https://datasheet.octopart.com:443/CC0805KRX7R9BB104-Yageo-datasheet-137700084.pdf?src-supplier=Future+Electronics, ComponentLink8Description=https://datasheet.octopart.com:443/CC0805KRX7R9BB104-Yageo-datasheet-82288757.pdf?src-supplier=Future+Electronics, ComponentLink8URL=https://datasheet.octopart.com:443/CC0805KRX7R9BB104-Yageo-datasheet-82288757.pdf?src-supplier=Future+Electronics, ComponentLink9Description=https://datasheet.octopart.com:443/CC0805KRX7R9BB104-Yageo-datasheet-62139192.pdf?src-supplier=Future+Electronics, ComponentLink9URL=https://datasheet.octopart.com:443/CC0805KRX7R9BB104-Yageo-datasheet-62139192.pdf?src-supplier=Future+Electronics, ComponentLink10Description=https://datasheet.octopart.com:443/CC0805KRX7R9BB104-Yageo-datasheet-27626582.pdf?src-supplier=Future+Electronics, ComponentLink10URL=https://datasheet.octopart.com:443/CC0805KRX7R9BB104-Yageo-datasheet-27626582.pdf?src-supplier=Future+Electronics, ComponentLink11Description=https://datasheet.octopart.com:443/CC0805KRX7R9BB104-Yageo-datasheet-15895757.pdf?src-supplier=Future+Electronics, ComponentLink11URL=https://datasheet.octopart.com:443/CC0805KRX7R9BB104-Yageo-datasheet-15895757.pdf?src-supplier=Future+Electronics, ComponentLink12Description=https://datasheet.octopart.com:443/CC0805KRX7R9BB104-Yageo-datasheet-12526321.pdf?src-supplier=Future+Electronics, ComponentLink12URL=https://datasheet.octopart.com:443/CC0805KRX7R9BB104-Yageo-datasheet-12526321.pdf?src-supplier=Future+Electronics, ComponentLink13Description=https://datasheet.octopart.com:443/CC0805KRX7R9BB104-Yageo-datasheet-8324192.pdf?src-supplier=Future+Electronics, ComponentLink13URL=https://datasheet.octopart.com:443/CC0805KRX7R9BB104-Yageo-datasheet-8324192.pdf?src-supplier=Future+Electronics, ComponentLink14Description=https://datasheet.octopart.com/CC0805KRX7R9BB104-Yageo-datasheet-10883670.pdf, ComponentLink14URL=https://datasheet.octopart.com/CC0805KRX7R9BB104-Yageo-datasheet-10883670.pdf, ComponentLink15Description=https://datasheet.octopart.com:443/CC0805KRX7R9BB104-Yageo-datasheet-62336348.pdf?src-supplier=Newark, ComponentLink15URL=https://datasheet.octopart.com:443/CC0805KRX7R9BB104-Yageo-datasheet-62336348.pdf?src-supplier=Newark, ComponentLink16Description=https://datasheet.octopart.com:443/CC0805KRX7R9BB104-Yageo-datasheet-181969852.pdf?src-supplier=Newark, ComponentLink16URL=https://datasheet.octopart.com:443/CC0805KRX7R9BB104-Yageo-datasheet-181969852.pdf?src-supplier=Newark, ComponentLink17Description=https://datasheet.octopart.com:443/CC0805KRX7R9BB104-Yageo-datasheet-181969851.pdf?src-supplier=Newark, ComponentLink17URL=https://datasheet.octopart.com:443/CC0805KRX7R9BB104-Yageo-datasheet-181969851.pdf?src-supplier=Newark, ComponentLink18Description=https://datasheet.octopart.com:443/CC0805KRX7R9BB104-Phycomp-datasheet-499490.pdf?src-supplier=Newark, ComponentLink18URL=https://datasheet.octopart.com:443/CC0805KRX7R9BB104-Phycomp-datasheet-499490.pdf?src-supplier=Newark, ComponentLink19Description=https://datasheet.octopart.com:443/CC0805KRX7R9BB104-Yageo-datasheet-147453679.pdf?src-supplier=element14+APAC, ComponentLink19URL=https://datasheet.octopart.com:443/CC0805KRX7R9BB104-Yageo-datasheet-147453679.pdf?src-supplier=element14+APAC, ComponentLink20Description=https://datasheet.octopart.com:443/CC0805KRX7R9BB104-Yageo-datasheet-151948686.pdf?src-supplier=Farnell, ComponentLink20URL=https://datasheet.octopart.com:443/CC0805KRX7R9BB104-Yageo-datasheet-151948686.pdf?src-supplier=Farnell, ComponentLink21Description=https://datasheet.octopart.com:443/CC0805KRX7R9BB104-Yageo-Group-datasheet-188689702.pdf?src-supplier=Farnell, ComponentLink21URL=https://datasheet.octopart.com:443/CC0805KRX7R9BB104-Yageo-Group-datasheet-188689702.pdf?src-supplier=Farnell, ComponentLink22Description=https://datasheet.octopart.com:443/CC0805KRX7R9BB104-Phycomp-datasheet-500777.pdf?src-supplier=Farnell, ComponentLink22URL=https://datasheet.octopart.com:443/CC0805KRX7R9BB104-Phycomp-datasheet-500777.pdf?src-supplier=Farnell, ComponentLink23Description=https://datasheet.octopart.com:443/CC0805KRX7R9BB104-Yageo-Group-datasheet-165992755.pdf?src-supplier=ODG+(Origin+Data+Global), ComponentLink23URL=https://datasheet.octopart.com:443/CC0805KRX7R9BB104-Yageo-Group-datasheet-165992755.pdf?src-supplier=ODG+(Origin+Data+Global), ComponentLink24Description=https://datasheet.octopart.com:443/CC0805KRX7R9BB104-Yageo-datasheet-140260305.pdf?src-supplier=SOS+electronic, ComponentLink24URL=https://datasheet.octopart.com:443/CC0805KRX7R9BB104-Yageo-datasheet-140260305.pdf?src-supplier=SOS+electronic, ComponentLink25Description=https://datasheet.octopart.com:443/CC0805KRX7R9BB104-Yageo-datasheet-120101875.pdf?src-supplier=Megastar, ComponentLink25URL=https://datasheet.octopart.com:443/CC0805KRX7R9BB104-Yageo-datasheet-120101875.pdf?src-supplier=Megastar, ComponentLink26Description=https://datasheet.octopart.com:443/CC0805KRX7R9BB104-Yageo-datasheet-8701427.pdf?src-supplier=element14, ComponentLink26URL=https://datasheet.octopart.com:443/CC0805KRX7R9BB104-Yageo-datasheet-8701427.pdf?src-supplier=element14, ComponentLink27Description=https://datasheet.octopart.com:443/CC0805KRX7R9BB104-Yageo-datasheet-5301394.pdf?src-supplier=element14, ComponentLink27URL=https://datasheet.octopart.com:443/CC0805KRX7R9BB104-Yageo-datasheet-5301394.pdf?src-supplier=element14, ComponentLink28Description=https://datasheet.octopart.com:443/CC0805KRX7R9BB104-Yageo-datasheet-17600895.pdf?src-supplier=TME, ComponentLink28URL=https://datasheet.octopart.com:443/CC0805KRX7R9BB104-Yageo-datasheet-17600895.pdf?src-supplier=TME, ComponentLink29Description=https://datasheet.octopart.com:443/CC0805KRX7R9BB104-Yageo-datasheet-118396.pdf?src-supplier=DigiKey, ComponentLink29URL=https://datasheet.octopart.com:443/CC0805KRX7R9BB104-Yageo-datasheet-118396.pdf?src-supplier=DigiKey, ComponentLink30Description=http://sigma.octopart.com:80/conflict_mineral_statement/Yageo-company-3.pdf?src-supplier=Compliance+Statements, ComponentLink30URL=http://sigma.octopart.com:80/conflict_mineral_statement/Yageo-company-3.pdf?src-supplier=Compliance+Statements, ComponentLink31Description=http://sigma.octopart.com:80/rohs_statement/Yageo-company-2.pdf?src-supplier=Compliance+Statements, ComponentLink31URL=http://sigma.octopart.com:80/rohs_statement/Yageo-company-2.pdf?src-supplier=Compliance+Statements, Country of Origin="Mainland China, Taiwan", Depth=1.25mm, Export Control Classification Number (ECCN) Code=EAR99, Halogen Free="Halogen Free", Harmonized Tariff Schedule (HTS) Code=8532.24.00.20, Height=850µm, Introduction Date=2003-01-27, Lead Free="Lead Free", Length=2mm, Lifecycle Status=Production, Manufacturer Part Number=CC0805KRX7R9BB104, Material=Ceramic, Mounting Technology="Surface Mount", Number of Terminals=2, Packaging="Cut Tape", Pins=2, Pricing="1=0.11, 10=0.06, 50=0.0412, 100=0.0356, 500=0.02612, 1000=0.02323 (USD)", Radiation Hardening=No, REACH SVHC=Yes, RoHS=Compliant, Schedule B="8532240020, 8532240020|8532240020|8532240020|8532240020|8532240020|8532240020|8532240020|8532240020|8532240020|8532240020|8532240020|8532240020|8532240020|8532240020|8532240020|8532240020, 8532240020|8532240020|8532240020|8532240020|8532240020|8532240020|8532240020|8532240020|8532240020|8532240020|8532240020|8532240020|8532240020|8532240020|8532240020|8532240020|8532240020, 8532240020|8532240020|8532240020|8532240020|8532240020|8532240020|8532240020|8532240020|8532240020|8532240020|8532240020|8532240020|8532240020|8532240020|8532240020|8532240020|8532240020|8532240020", Stock=986511, Supplier=DigiKey, Supplier 1=DigiKey, Supplier Part Number 1=311-1140-1-ND, Termination=SMD/SMT, Thickness=838.2µm, Voltage Rating=50V, Voltage Rating (DC)=50V, Width=1.25mm
C5: library part 35ZLH100MEFC6.3X11, "Aluminum Electrolytic Capacitors-DIP DIP, D6.3xL11mm 100μF ±20% 35V 94mΩ 540mA 6000Hrs@105℃", Case/Package=Radial, Dielectric Material=Aluminium, Leakage Current=35µA, Manufacturer=Rubycon, Max Operating Temperature=105°C, Min Operating Temperature=-40°C, Ripple Current=270mA, Ripple Current (AC)=540mA, Supplier Part Number=1189-1300-ND, Tolerance=20%, Voltage=35V, Category="Aluminum Electrolytic Capacitors", ComponentLink1Description=https://datasheet.octopart.com:443/35ZLH100MEFC6.3X11-Rubycon-datasheet-181960486.pdf?src-supplier=IHS, ComponentLink1URL=https://datasheet.octopart.com:443/35ZLH100MEFC6.3X11-Rubycon-datasheet-181960486.pdf?src-supplier=IHS, ComponentLink2Description=https://datasheet.octopart.com:443/35ZLH100MEFC6.3X11-Rubycon-datasheet-12510202.pdf?src-supplier=LKR, ComponentLink2URL=https://datasheet.octopart.com:443/35ZLH100MEFC6.3X11-Rubycon-datasheet-12510202.pdf?src-supplier=LKR, ComponentLink3Description=https://datasheet.octopart.com:443/35ZLH100MEFC6.3X11-Rubycon-datasheet-154841597.pdf?src-supplier=JRH+Electronics, ComponentLink3URL=https://datasheet.octopart.com:443/35ZLH100MEFC6.3X11-Rubycon-datasheet-154841597.pdf?src-supplier=JRH+Electronics, ComponentLink4Description=https://datasheet.octopart.com:443/35ZLH100MEFC6.3X11-Rubycon-datasheet-66579747.pdf?src-supplier=Newark, ComponentLink4URL=https://datasheet.octopart.com:443/35ZLH100MEFC6.3X11-Rubycon-datasheet-66579747.pdf?src-supplier=Newark, ComponentLink5Description=https://datasheet.octopart.com:443/35ZLH100MEFC6.3X11-Rubycon-datasheet-41194731.pdf?src-supplier=Newark, ComponentLink5URL=https://datasheet.octopart.com:443/35ZLH100MEFC6.3X11-Rubycon-datasheet-41194731.pdf?src-supplier=Newark, ComponentLink6Description=https://datasheet.octopart.com:443/35ZLH100MEFC6.3X11-Rubycon-datasheet-10030022.pdf?src-supplier=element14+APAC, ComponentLink6URL=https://datasheet.octopart.com:443/35ZLH100MEFC6.3X11-Rubycon-datasheet-10030022.pdf?src-supplier=element14+APAC, ComponentLink7Description=https://datasheet.octopart.com:443/35ZLH100MEFC6.3X11-Rubycon-datasheet-8493648.pdf?src-supplier=element14+APAC, ComponentLink7URL=https://datasheet.octopart.com:443/35ZLH100MEFC6.3X11-Rubycon-datasheet-8493648.pdf?src-supplier=element14+APAC, ComponentLink8Description=https://datasheet.octopart.com:443/35ZLH100MEFC6.3X11-Rubycon-datasheet-7128063.pdf?src-supplier=element14+APAC, ComponentLink8URL=https://datasheet.octopart.com:443/35ZLH100MEFC6.3X11-Rubycon-datasheet-7128063.pdf?src-supplier=element14+APAC, ComponentLink9Description=https://datasheet.octopart.com:443/35ZLH100MEFC6.3X11-Rubycon-datasheet-86451566.pdf?src-supplier=Master+Electronics, ComponentLink9URL=https://datasheet.octopart.com:443/35ZLH100MEFC6.3X11-Rubycon-datasheet-86451566.pdf?src-supplier=Master+Electronics, Country of Origin=Japan, Diameter=6.3mm, Dissipation Factor=12%, Export Control Classification Number (ECCN) Code=EAR99, Harmonized Tariff Schedule (HTS) Code=8532.22.00.20, Height=12.5mm, Height - Seated (Max)=12.4968mm, Impedance=94mΩ, Introduction Date=2010-09-20, Lead Diameter=500µm, Lead Pitch=2.5mm, Length=11mm, Life (Hours)=6000hours, Lifecycle Status=Production, Manufacturer Part Number=35ZLH100MEFC6.3X11, Mounting Technology="Through Hole", Number of Terminals=2, Packaging=Bulk, Pins=2, Pricing="1=0.33, 10=0.203, 50=0.148, 100=0.1304, 500=0.09992, 2000=0.08229, 4000=0.07562, 6000=0.07225 (USD)", Radiation Hardening=No, REACH SVHC=Yes, RoHS=Compliant, Schedule B="8532220020, 8532220020|8532220020|8532220020|8532220020|8532220020|8532220020|8532220020|8532220020|8532220020|8532220020|8532220020|8532220020|8532220020|8532220020|8532220020|8532220020|8532220020|8532220020|8532220020|8532220020|8532220020|8532220020|8532220020|85", Stock=118937, Supplier=DigiKey, Supplier 1=DigiKey, Supplier Part Number 1=1189-1300-ND, Terminal Pitch=2.5mm, Termination=Radial, Voltage Rating=35V, Voltage Rating (AC)=35V, Voltage Rating (DC)=35V
C9: library part CC0603KRX7R9BB223, "Surface Mount Ceramic Multilayer Capacitor 0.022uF 10% X7R 50V 0603 Paper T/R", Case Code (Imperial)=0603, Case Code (Metric)=1608, Dielectric=X7R, Dielectric Material=Ceramic, Insulation Resistance=100GΩ, Manufacturer="Yageo Group", Max Operating Temperature=125°C, Min Operating Temperature=-55°C, Supplier Part Number=311-1370-1-ND, Tolerance=10%, Voltage=50V, Case/Package=0603, Category="Ceramic Capacitors", China RoHS=Compliant, ComponentLink1Description=https://datasheet.octopart.com:443/CC0603KRX7R9BB223-Yageo-datasheet-177165144.pdf?src-supplier=IHS, ComponentLink1URL=https://datasheet.octopart.com:443/CC0603KRX7R9BB223-Yageo-datasheet-177165144.pdf?src-supplier=IHS, ComponentLink2Description=https://datasheet.octopart.com/CC0603KRX7R9BB223-Yageo-datasheet-10883670.pdf, ComponentLink2URL=https://datasheet.octopart.com/CC0603KRX7R9BB223-Yageo-datasheet-10883670.pdf, ComponentLink3Description=https://datasheet.octopart.com:443/CC0603KRX7R9BB223-Yageo-datasheet-147453679.pdf?src-supplier=Newark, ComponentLink3URL=https://datasheet.octopart.com:443/CC0603KRX7R9BB223-Yageo-datasheet-147453679.pdf?src-supplier=Newark, ComponentLink4Description=https://datasheet.octopart.com:443/CC0603KRX7R9BB223-Yageo-datasheet-499490.pdf?src-supplier=Newark, ComponentLink4URL=https://datasheet.octopart.com:443/CC0603KRX7R9BB223-Yageo-datasheet-499490.pdf?src-supplier=Newark, ComponentLink5Description=https://datasheet.octopart.com:443/CC0603KRX7R9BB223-Yageo-datasheet-5301394.pdf?src-supplier=Newark, ComponentLink5URL=https://datasheet.octopart.com:443/CC0603KRX7R9BB223-Yageo-datasheet-5301394.pdf?src-supplier=Newark, ComponentLink6Description=https://sigma.octopart.com:443/147830939/technical_drawing/Yageo-CC0603KRX7R9BB223.pdf?src-supplier=Upverter, ComponentLink6URL=https://sigma.octopart.com:443/147830939/technical_drawing/Yageo-CC0603KRX7R9BB223.pdf?src-supplier=Upverter, ComponentLink7Description=https://datasheet.octopart.com:443/CC0603KRX7R9BB223-Yageo-datasheet-82288757.pdf?src-supplier=Upverter, ComponentLink7URL=https://datasheet.octopart.com:443/CC0603KRX7R9BB223-Yageo-datasheet-82288757.pdf?src-supplier=Upverter, ComponentLink8Description=https://datasheet.octopart.com:443/CC0603KRX7R9BB223-Yageo-datasheet-62139192.pdf?src-supplier=Upverter, ComponentLink8URL=https://datasheet.octopart.com:443/CC0603KRX7R9BB223-Yageo-datasheet-62139192.pdf?src-supplier=Upverter, ComponentLink9Description=https://datasheet.octopart.com:443/CC0603KRX7R9BB223-Yageo-Group-datasheet-189192896.pdf?src-supplier=Future+Electronics, ComponentLink9URL=https://datasheet.octopart.com:443/CC0603KRX7R9BB223-Yageo-Group-datasheet-189192896.pdf?src-supplier=Future+Electronics, ComponentLink10Description=https://datasheet.octopart.com:443/CC0603KRX7R9BB223-Yageo-datasheet-166511530.pdf?src-supplier=Future+Electronics, ComponentLink10URL=https://datasheet.octopart.com:443/CC0603KRX7R9BB223-Yageo-datasheet-166511530.pdf?src-supplier=Future+Electronics, ComponentLink11Description=https://datasheet.octopart.com:443/CC0603KRX7R9BB223-Yageo-datasheet-137700082.pdf?src-supplier=Future+Electronics, ComponentLink11URL=https://datasheet.octopart.com:443/CC0603KRX7R9BB223-Yageo-datasheet-137700082.pdf?src-supplier=Future+Electronics, ComponentLink12Description=https://datasheet.octopart.com:443/CC0603KRX7R9BB223-Yageo-datasheet-137700084.pdf?src-supplier=Future+Electronics, ComponentLink12URL=https://datasheet.octopart.com:443/CC0603KRX7R9BB223-Yageo-datasheet-137700084.pdf?src-supplier=Future+Electronics, ComponentLink13Description=https://datasheet.octopart.com:443/CC0603KRX7R9BB223-Yageo-datasheet-15895757.pdf?src-supplier=Future+Electronics, ComponentLink13URL=https://datasheet.octopart.com:443/CC0603KRX7R9BB223-Yageo-datasheet-15895757.pdf?src-supplier=Future+Electronics, ComponentLink14Description=https://datasheet.octopart.com:443/CC0603KRX7R9BB223-Yageo-datasheet-12526321.pdf?src-supplier=Future+Electronics, ComponentLink14URL=https://datasheet.octopart.com:443/CC0603KRX7R9BB223-Yageo-datasheet-12526321.pdf?src-supplier=Future+Electronics, ComponentLink15Description=https://datasheet.octopart.com:443/CC0603KRX7R9BB223-Yageo-datasheet-8324192.pdf?src-supplier=Future+Electronics, ComponentLink15URL=https://datasheet.octopart.com:443/CC0603KRX7R9BB223-Yageo-datasheet-8324192.pdf?src-supplier=Future+Electronics, ComponentLink16Description=https://datasheet.octopart.com:443/CC0603KRX7R9BB223-Yageo-datasheet-62336348.pdf?src-supplier=Farnell, ComponentLink16URL=https://datasheet.octopart.com:443/CC0603KRX7R9BB223-Yageo-datasheet-62336348.pdf?src-supplier=Farnell, ComponentLink17Description=https://datasheet.octopart.com:443/CC0603KRX7R9BB223-Yageo-datasheet-151948686.pdf?src-supplier=Farnell, ComponentLink17URL=https://datasheet.octopart.com:443/CC0603KRX7R9BB223-Yageo-datasheet-151948686.pdf?src-supplier=Farnell, ComponentLink18Description=https://datasheet.octopart.com:443/CC0603KRX7R9BB223-Yageo-datasheet-500777.pdf?src-supplier=Farnell, ComponentLink18URL=https://datasheet.octopart.com:443/CC0603KRX7R9BB223-Yageo-datasheet-500777.pdf?src-supplier=Farnell, ComponentLink19Description=https://datasheet.octopart.com:443/CC0603KRX7R9BB223-Yageo-datasheet-27626582.pdf?src-supplier=Seeed+Studio, ComponentLink19URL=https://datasheet.octopart.com:443/CC0603KRX7R9BB223-Yageo-datasheet-27626582.pdf?src-supplier=Seeed+Studio, ComponentLink20Description=https://datasheet.octopart.com:443/CC0603KRX7R9BB223-Yageo-datasheet-178019131.pdf?src-supplier=Burklin+Elektronik, ComponentLink20URL=https://datasheet.octopart.com:443/CC0603KRX7R9BB223-Yageo-datasheet-178019131.pdf?src-supplier=Burklin+Elektronik, ComponentLink21Description=https://datasheet.octopart.com:443/CC0603KRX7R9BB223-Yageo-Group-datasheet-165992755.pdf?src-supplier=ODG+(Origin+Data+Global), ComponentLink21URL=https://datasheet.octopart.com:443/CC0603KRX7R9BB223-Yageo-Group-datasheet-165992755.pdf?src-supplier=ODG+(Origin+Data+Global), ComponentLink22Description=https://datasheet.octopart.com:443/CC0603KRX7R9BB223-Yageo-datasheet-140260305.pdf?src-supplier=SOS+electronic, ComponentLink22URL=https://datasheet.octopart.com:443/CC0603KRX7R9BB223-Yageo-datasheet-140260305.pdf?src-supplier=SOS+electronic, ComponentLink23Description=https://datasheet.octopart.com:443/CC0603KRX7R9BB223-Yageo-datasheet-120101875.pdf?src-supplier=Megastar, ComponentLink23URL=https://datasheet.octopart.com:443/CC0603KRX7R9BB223-Yageo-datasheet-120101875.pdf?src-supplier=Megastar, ComponentLink24Description=https://datasheet.octopart.com:443/CC0603KRX7R9BB223-Yageo-datasheet-8701427.pdf?src-supplier=element14, ComponentLink24URL=https://datasheet.octopart.com:443/CC0603KRX7R9BB223-Yageo-datasheet-8701427.pdf?src-supplier=element14, ComponentLink25Description=https://datasheet.octopart.com:443/CC0603KRX7R9BB223-Yageo-datasheet-17600895.pdf?src-supplier=TME, ComponentLink25URL=https://datasheet.octopart.com:443/CC0603KRX7R9BB223-Yageo-datasheet-17600895.pdf?src-supplier=TME, ComponentLink26Description=http://sigma.octopart.com:80/conflict_mineral_statement/Yageo-company-3.pdf?src-supplier=Compliance+Statements, ComponentLink26URL=http://sigma.octopart.com:80/conflict_mineral_statement/Yageo-company-3.pdf?src-supplier=Compliance+Statements, ComponentLink27Description=http://sigma.octopart.com:80/rohs_statement/Yageo-company-2.pdf?src-supplier=Compliance+Statements, ComponentLink27URL=http://sigma.octopart.com:80/rohs_statement/Yageo-company-2.pdf?src-supplier=Compliance+Statements, Composition=Ceramic, Country of Origin="Mainland China, Taiwan", Depth=800µm, Export Control Classification Number (ECCN) Code=EAR99, Halogen Free="Halogen Free", Harmonized Tariff Schedule (HTS) Code=8532.24.00.20, Height=800µm, Introduction Date=2003-01-27, Lead Free="Lead Free", Length=1.6mm, Lifecycle Status=Production, Manufacturer Part Number=CC0603KRX7R9BB223, Material=Ceramic, Mounting Technology="Surface Mount", Number of Terminals=2, Packaging="Cut Tape (CT)", Pins=2, Pricing="1=0.1, 10=0.042, 50=0.0288, 100=0.0247, 500=0.01782, 1000=0.0157 (USD)", Radiation Hardening=No, REACH SVHC=Yes, RoHS=Compliant, Schedule B="8532240020, 8532240020|8532240020, 8532240020|8532240020|8532240020, 8532240020|8532240020|8532240020|8532240020", Stock=1263, Supplier=DigiKey, Supplier 1=DigiKey, Supplier Part Number 1=311-1370-1-ND, Termination=SMD/SMT, Thickness=889µm, Voltage Rating=50V, Voltage Rating (AC)=50V, Voltage Rating (DC)=50V, Width=800µm
C10: library part GRM155C80J225KE95D, "6.3V 2.2uF X6S ±10% 0402 Multilayer Ceramic Capacitors MLCC - SMD/SMT ROHS", Case Code (Imperial)=0402, Case Code (Metric)=1005, Dielectric=X6S, Dielectric Material=Ceramic, Manufacturer=Murata, Manufacturer Lifecycle Status="IN PRODUCTION", Max Operating Temperature=105°C, Min Operating Temperature=-55°C, Supplier Part Number=490-10012-1-ND, Tolerance=10%, Voltage Rating=6.3V, Case/Package=0402, Category="Ceramic Capacitors", ComponentLink1Description=https://datasheet.octopart.com:443/GRM155C80J225KE95D-Murata-datasheet-149522920.pdf?src-supplier=Newark, ComponentLink1URL=https://datasheet.octopart.com:443/GRM155C80J225KE95D-Murata-datasheet-149522920.pdf?src-supplier=Newark, ComponentLink2Description=https://datasheet.octopart.com:443/GRM155C80J225KE95D-Murata-datasheet-179080476.pdf?src-supplier=Arrow.cn, ComponentLink2URL=https://datasheet.octopart.com:443/GRM155C80J225KE95D-Murata-datasheet-179080476.pdf?src-supplier=Arrow.cn, ComponentLink3Description=https://datasheet.octopart.com:443/GRM155C80J225KE95D-Murata-datasheet-165579666.pdf?src-supplier=TME, ComponentLink3URL=https://datasheet.octopart.com:443/GRM155C80J225KE95D-Murata-datasheet-165579666.pdf?src-supplier=TME, ComponentLink4Description=https://datasheet.octopart.com:443/GRM155C80J225KE95D-Murata-datasheet-141266224.pdf?src-supplier=Ciiva, ComponentLink4URL=https://datasheet.octopart.com:443/GRM155C80J225KE95D-Murata-datasheet-141266224.pdf?src-supplier=Ciiva, ComponentLink5Description=https://datasheet.octopart.com:443/GRM155C80J225KE95D-Murata-datasheet-140688039.pdf?src-supplier=Ciiva, ComponentLink5URL=https://datasheet.octopart.com:443/GRM155C80J225KE95D-Murata-datasheet-140688039.pdf?src-supplier=Ciiva, ComponentLink6Description=https://datasheet.octopart.com:443/GRM155C80J225KE95D-Murata-datasheet-138740490.pdf?src-supplier=Ciiva, ComponentLink6URL=https://datasheet.octopart.com:443/GRM155C80J225KE95D-Murata-datasheet-138740490.pdf?src-supplier=Ciiva, ComponentLink7Description=https://datasheet.octopart.com:443/GRM155C80J225KE95D-Murata-datasheet-32479577.pdf?src-supplier=Future+Electronics, ComponentLink7URL=https://datasheet.octopart.com:443/GRM155C80J225KE95D-Murata-datasheet-32479577.pdf?src-supplier=Future+Electronics, ComponentLink8Description=https://datasheet.octopart.com/GRM155C80J225KE95D-Murata-datasheet-12515295.pdf, ComponentLink8URL=https://datasheet.octopart.com/GRM155C80J225KE95D-Murata-datasheet-12515295.pdf, ComponentLink9Description=https://datasheet.octopart.com/GRM155C80J225KE95D-Murata-datasheet-12510076.pdf, ComponentLink9URL=https://datasheet.octopart.com/GRM155C80J225KE95D-Murata-datasheet-12510076.pdf, ComponentLink10Description=https://datasheet.octopart.com/GRM155C80J225KE95D-Murata-datasheet-11978611.pdf, ComponentLink10URL=https://datasheet.octopart.com/GRM155C80J225KE95D-Murata-datasheet-11978611.pdf, ComponentLink11Description=https://datasheet.octopart.com/GRM155C80J225KE95D-Murata-datasheet-10025737.pdf, ComponentLink11URL=https://datasheet.octopart.com/GRM155C80J225KE95D-Murata-datasheet-10025737.pdf, ComponentLink12Description=https://datasheet.octopart.com/GRM155C80J225KE95D-Murata-datasheet-8819587.pdf, ComponentLink12URL=https://datasheet.octopart.com/GRM155C80J225KE95D-Murata-datasheet-8819587.pdf, ComponentLink13Description=https://datasheet.octopart.com/GRM155C80J225KE95D-Murata-datasheet-15634835.pdf, ComponentLink13URL=https://datasheet.octopart.com/GRM155C80J225KE95D-Murata-datasheet-15634835.pdf, ComponentLink14Description=http://sigma.octopart.com:80/reach_statement/Murata-company-16.pdf?src-supplier=Compliance+Statements, ComponentLink14URL=http://sigma.octopart.com:80/reach_statement/Murata-company-16.pdf?src-supplier=Compliance+Statements, Country of Origin="Japan, Mainland China, Philippines, Singapore, Thailand", Export Control Classification Number (ECCN) Code=EAR99, Harmonized Tariff Schedule (HTS) Code=8532.24.00.20, Height=500µm, Introduction Date=2012-07-24, Length=1mm, Lifecycle Status=Production, Manufacturer Part Number=GRM155C80J225KE95D, Material=Ceramic, Mounting Technology="Surface Mount", Number of Terminals=2, Packaging="Tape & Reel (TR)", Pricing="1=0.1, 10=0.057, 50=0.039, 100=0.0336, 500=0.02462, 1000=0.02186, 2500=0.01896, 5000=0.01722 (USD)", REACH SVHC=Yes, RoHS=Compliant, Schedule B="8532240020, 8532240020|8532240020|8532240020|8532240020|8532240020|8532240020|8532240020|8532240020|8532240020|8532240020|8532240020|8532240020|8532240020|8532240020|8532240020|8532240020|8532240020|8532240020|8532240020|8532240020|8532240020|8532240020|8532240020|85", Stock=4107485, Supplier=DigiKey, Supplier 1=DigiKey, Supplier Part Number 1=490-10012-1-ND, Thickness=500µm, Voltage Rating (DC)=6.3V, Width=500µm
C11 C12: library part GCM188R71H103KA37D, "50V 10nF X7R ±10% 0603 Multilayer Ceramic Capacitors MLCC - SMD/SMT ROHS", Case Code (Imperial)=0603, Case Code (Metric)=1608, Dielectric=X7R, Dielectric Material=Ceramic, Manufacturer=Murata, Manufacturer Lifecycle Status=NRND, Max Operating Temperature=125°C, Min Operating Temperature=-55°C, Ratings=AEC-Q200, Supplier Part Number=490-4778-1-ND, Tolerance=10%, Voltage=50V, Case/Package=0603, Category="Ceramic Capacitors", ComponentLink1Description=https://datasheet.octopart.com:443/GCM188R71H103KA37D-Murata-datasheet-39128445.pdf?src-supplier=Newark, ComponentLink1URL=https://datasheet.octopart.com:443/GCM188R71H103KA37D-Murata-datasheet-39128445.pdf?src-supplier=Newark, ComponentLink2Description=https://datasheet.octopart.com:443/GCM188R71H103KA37D-Murata-datasheet-62316953.pdf?src-supplier=element14+APAC, ComponentLink2URL=https://datasheet.octopart.com:443/GCM188R71H103KA37D-Murata-datasheet-62316953.pdf?src-supplier=element14+APAC, ComponentLink3Description=https://datasheet.octopart.com:443/GCM188R71H103KA37D-Murata-datasheet-8332723.pdf?src-supplier=_legacy+Avnet, ComponentLink3URL=https://datasheet.octopart.com:443/GCM188R71H103KA37D-Murata-datasheet-8332723.pdf?src-supplier=_legacy+Avnet, ComponentLink4Description=https://datasheet.octopart.com:443/GCM188R71H103KA37D-Murata-datasheet-14404452.pdf?src-supplier=Future+Electronics, ComponentLink4URL=https://datasheet.octopart.com:443/GCM188R71H103KA37D-Murata-datasheet-14404452.pdf?src-supplier=Future+Electronics, ComponentLink5Description=https://datasheet.octopart.com:443/GCM188R71H103KA37D-Murata-datasheet-12532847.pdf?src-supplier=Future+Electronics, ComponentLink5URL=https://datasheet.octopart.com:443/GCM188R71H103KA37D-Murata-datasheet-12532847.pdf?src-supplier=Future+Electronics, ComponentLink6Description=https://datasheet.octopart.com:443/GCM188R71H103KA37D-Murata-datasheet-41571772.pdf?src-supplier=Future+Electronics, ComponentLink6URL=https://datasheet.octopart.com:443/GCM188R71H103KA37D-Murata-datasheet-41571772.pdf?src-supplier=Future+Electronics, ComponentLink7Description=https://datasheet.octopart.com:443/GCM188R71H103KA37D-Murata-datasheet-165579661.pdf?src-supplier=TME, ComponentLink7URL=https://datasheet.octopart.com:443/GCM188R71H103KA37D-Murata-datasheet-165579661.pdf?src-supplier=TME, ComponentLink8Description=https://datasheet.octopart.com:443/GCM188R71H103KA37D-Murata-datasheet-62117434.pdf?src-supplier=TME, ComponentLink8URL=https://datasheet.octopart.com:443/GCM188R71H103KA37D-Murata-datasheet-62117434.pdf?src-supplier=TME, ComponentLink9Description=https://datasheet.octopart.com:443/GCM188R71H103KA37D-Murata-datasheet-140658743.pdf?src-supplier=Ciiva, ComponentLink9URL=https://datasheet.octopart.com:443/GCM188R71H103KA37D-Murata-datasheet-140658743.pdf?src-supplier=Ciiva, ComponentLink10Description=https://datasheet.octopart.com:443/GCM188R71H103KA37D-Murata-datasheet-138718308.pdf?src-supplier=Ciiva, ComponentLink10URL=https://datasheet.octopart.com:443/GCM188R71H103KA37D-Murata-datasheet-138718308.pdf?src-supplier=Ciiva, ComponentLink11Description=https://datasheet.octopart.com:443/GCM188R71H103KA37D-Murata-datasheet-11836845.pdf?src-supplier=Arrow+Electronics, ComponentLink11URL=https://datasheet.octopart.com:443/GCM188R71H103KA37D-Murata-datasheet-11836845.pdf?src-supplier=Arrow+Electronics, ComponentLink12Description=http://sigma.octopart.com:80/reach_statement/Murata-company-16.pdf?src-supplier=Compliance+Statements, ComponentLink12URL=http://sigma.octopart.com:80/reach_statement/Murata-company-16.pdf?src-supplier=Compliance+Statements, Country of Origin=Philippines, Depth=800µm, Export Control Classification Number (ECCN) Code=EAR99, Harmonized Tariff Schedule (HTS) Code=8532.24.00.20, Height=800µm, Introduction Date=2007-06-21, Lead Free="Lead Free", Length=1.6mm, Lifecycle Status=NRND, Manufacturer Part Number=GCM188R71H103KA37D, Mounting Technology="Surface Mount", Number of Terminals=2, Packaging="Cut Tape", Pricing="1=0.12, 10=0.065, 50=0.045, 100=0.0389, 500=0.02872, 1000=0.02559 (USD)", Radiation Hardening=No, REACH SVHC=Yes, RoHS=Compliant, Schedule B="8532240020, 8532240020|8532240020, 8532240020|8532240020|8532240020, 8532240020|8532240020|8532240020|8532240020", Stock=5464610, Supplier=DigiKey, Supplier 1=DigiKey, Supplier Part Number 1=490-4778-1-ND, Termination=SMD/SMT, Voltage Rating=50V, Voltage Rating (DC)=50V, Width=800µm
J1: "To ON BUTTON", Supplier Part Number 1=455-B2B-XH-A-ND, Supplier 1=DigiKey
J2: "To POWER", Supplier Part Number 1=455-B2B-XH-A-ND, Supplier 1=DigiKey
J3 J4 J6: "To MOTOR COILS", Supplier Part Number 1=455-B4B-XH-A-ND, Supplier 1=DigiKey
J5: Supplier Part Number 1=609-4326-1-ND, Supplier 1=DigiKey